# Altium PCB Main_PCB.PcbDoc (part 1 of 2)
Units mm, origin at the board's own origin, x right, y up, seen from the top; angles counter-clockwise.
Board outline 103.42 x 51.99 mm, 4 copper layers (Top Layer, Int1 (GND), Int2 (PWR), Bottom Layer), stack 1.586 mm thick; 103 components, 74 nets, 357 pads, 275 vias.
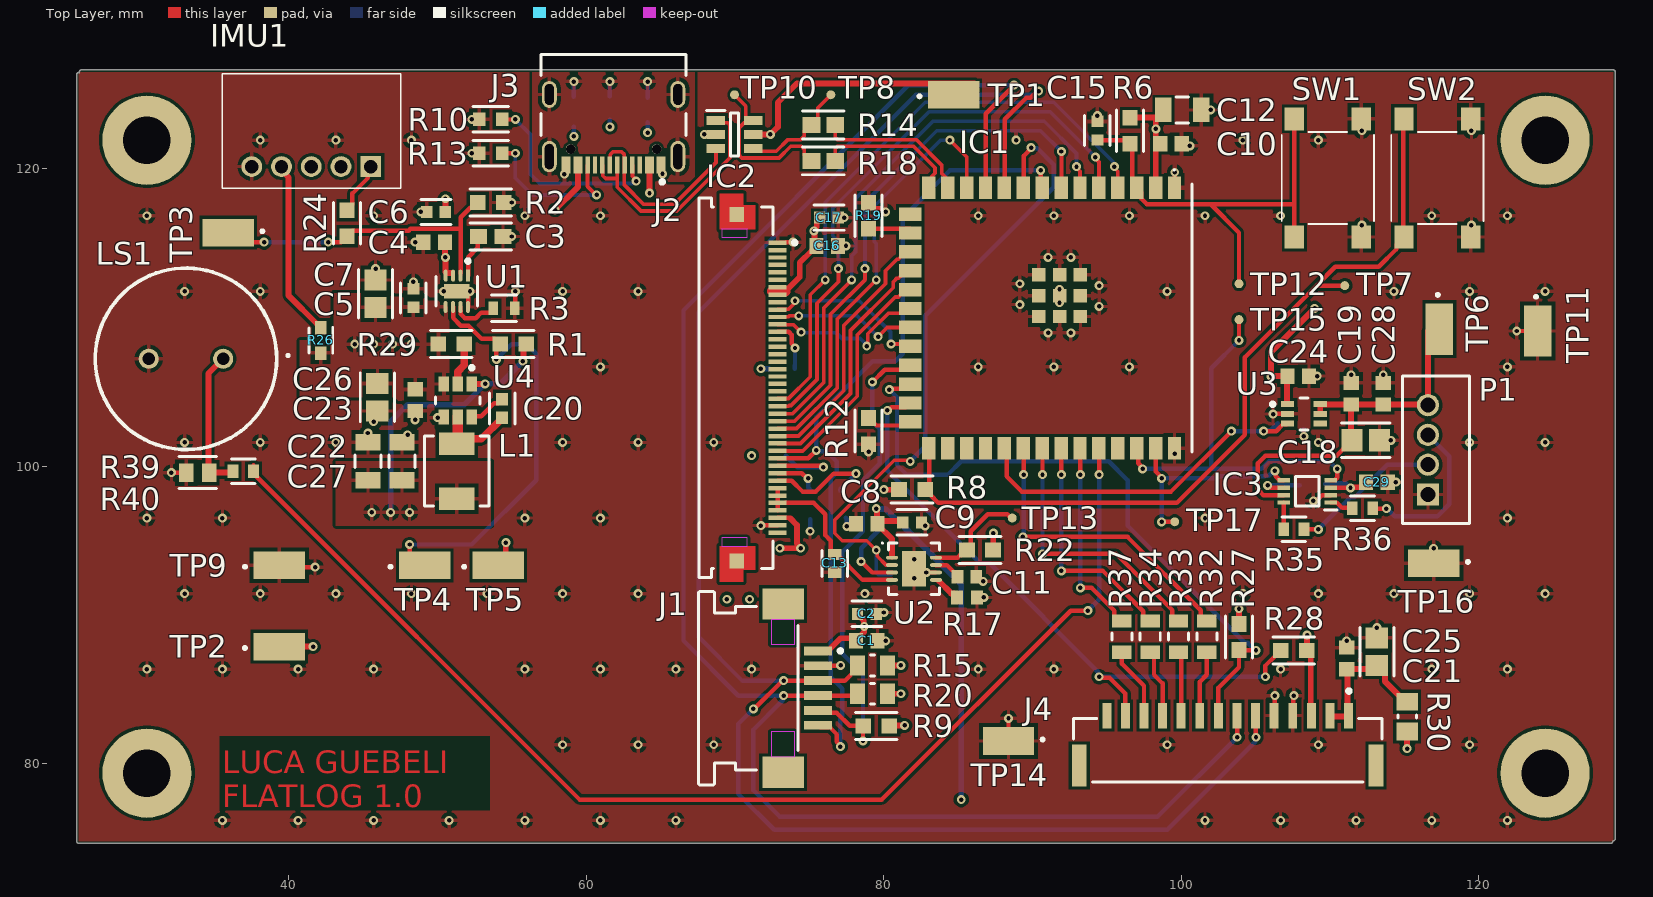
[diagram p0: Top Layer view]
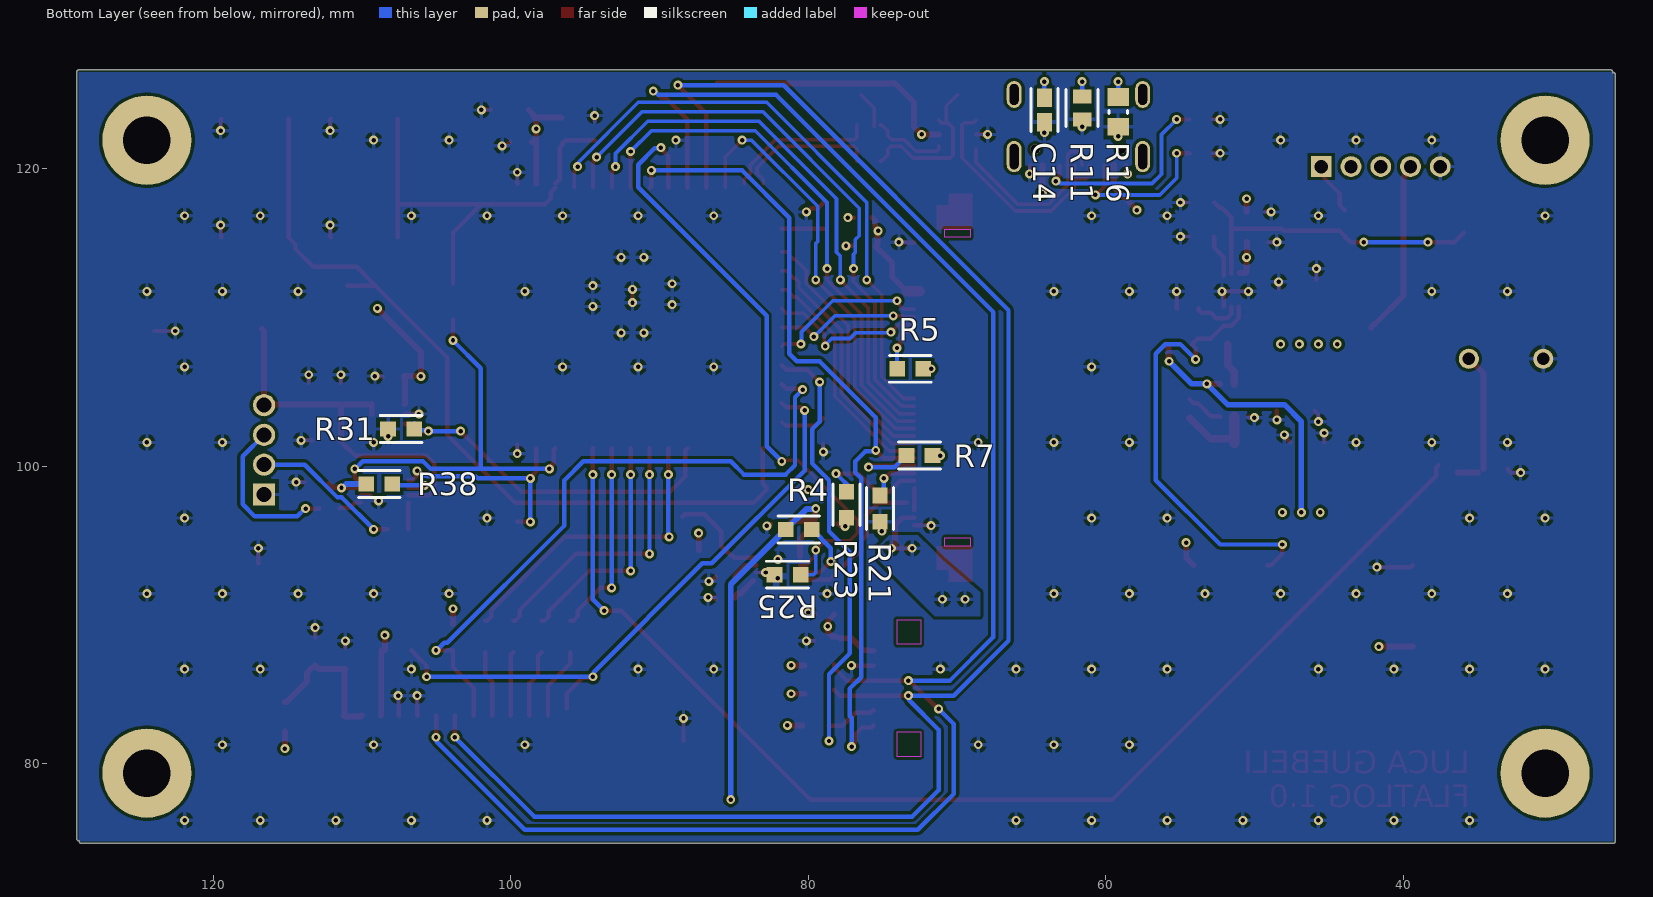
[diagram p1: Bottom Layer view, seen from below]
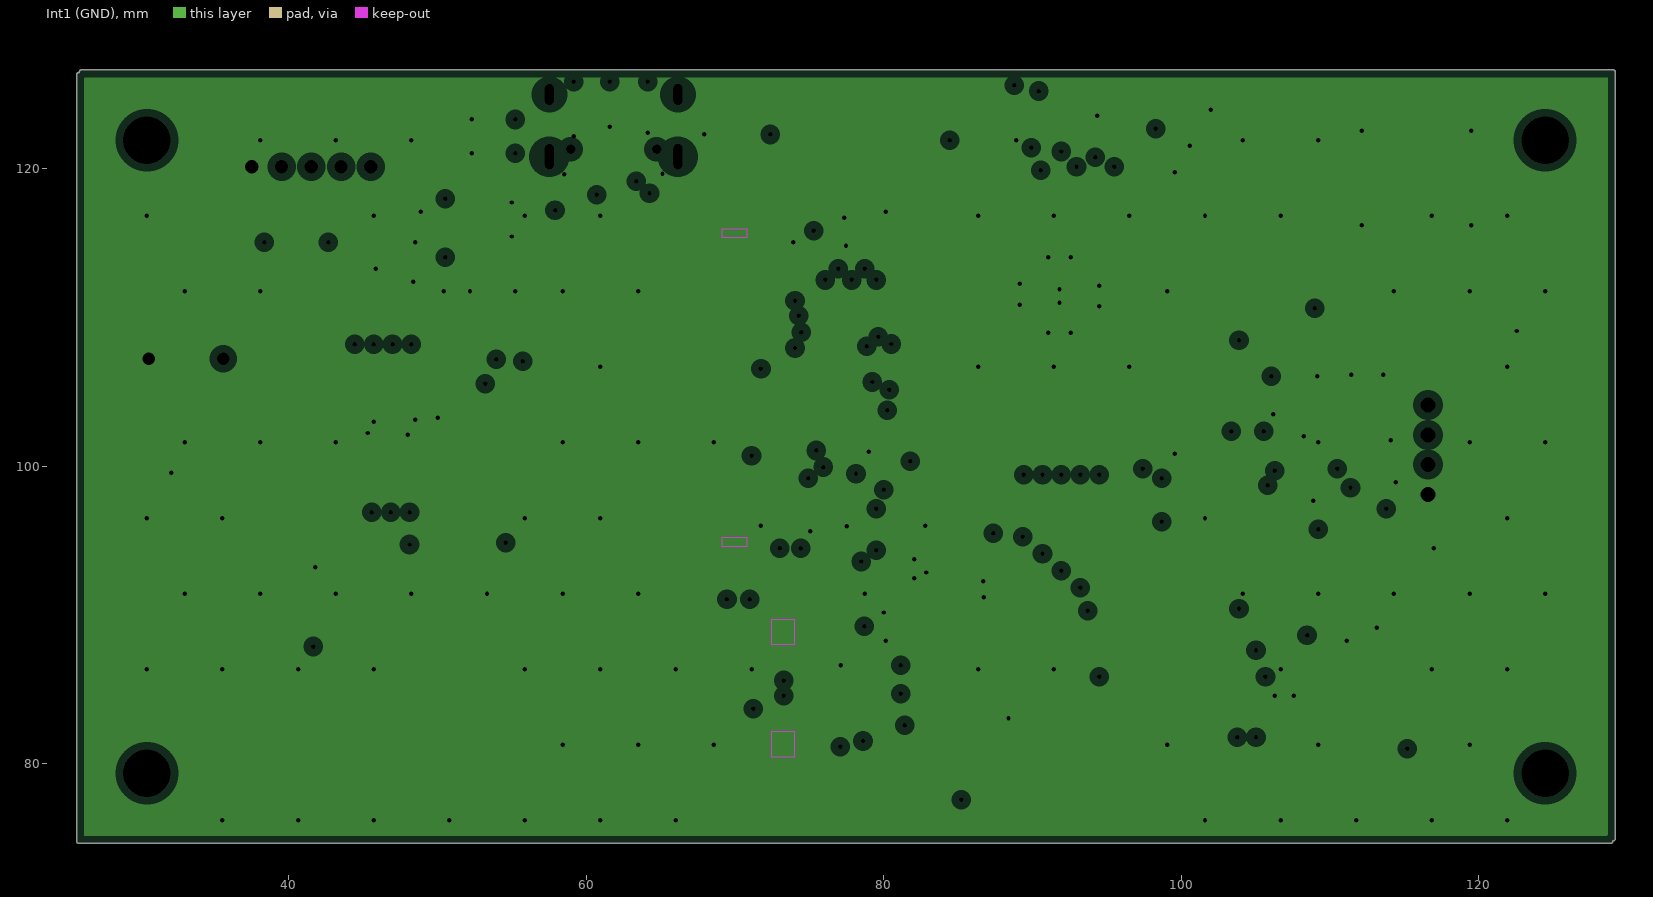
[diagram p2: Int1 (GND), clearances drawn from the general rule]
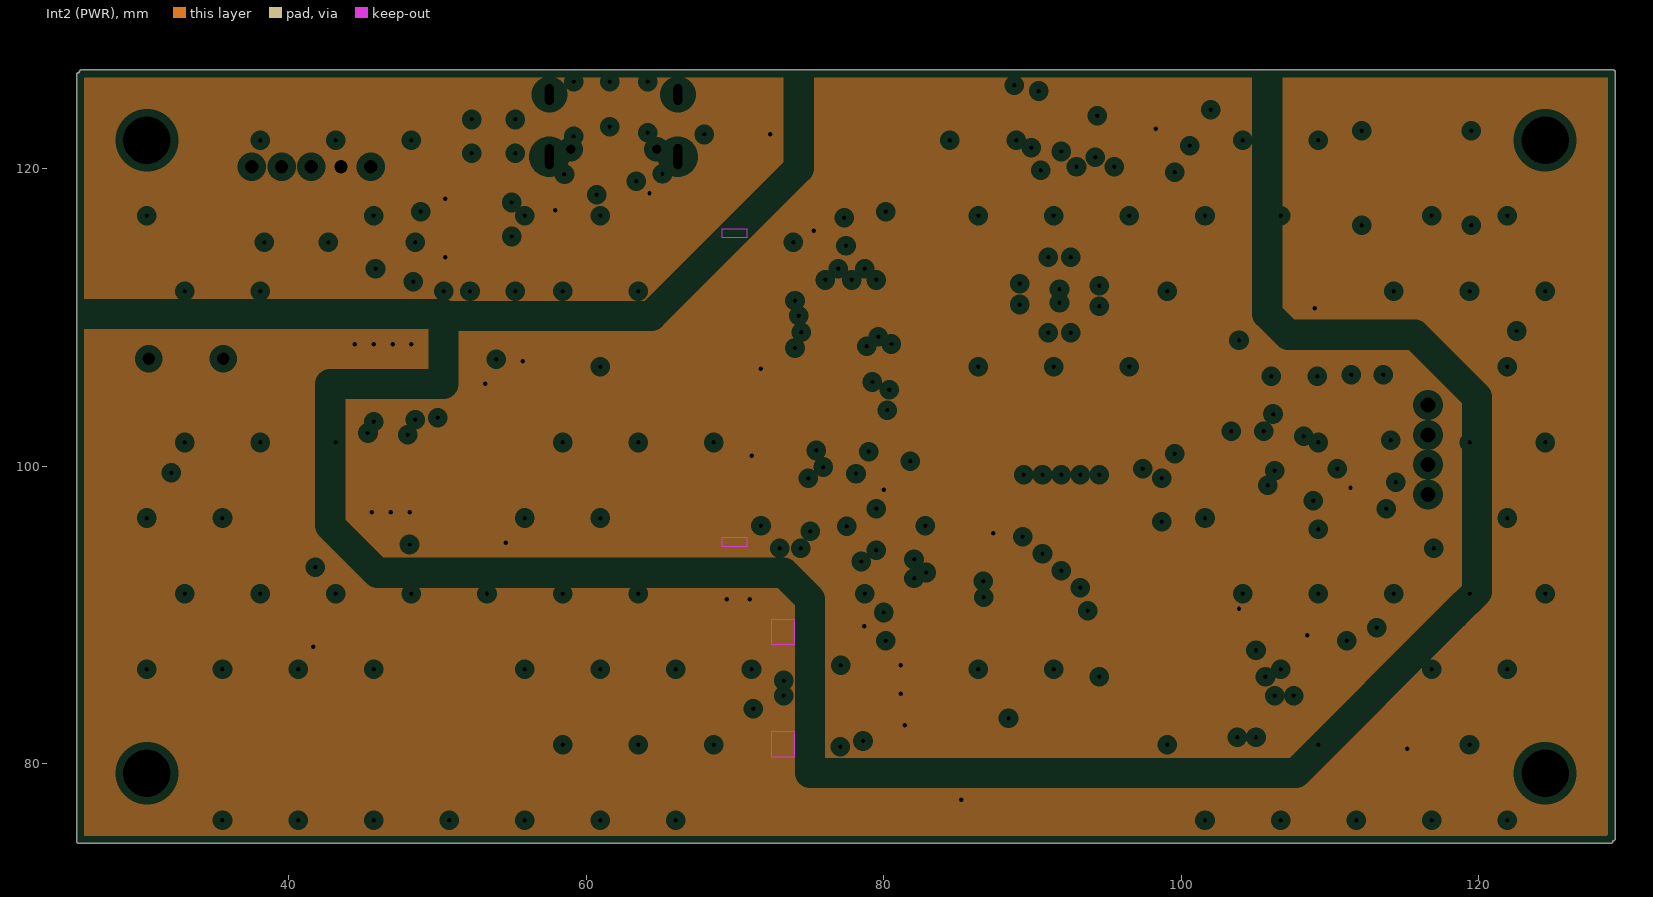
[diagram p3: Int2 (PWR), clearances drawn from the general rule]
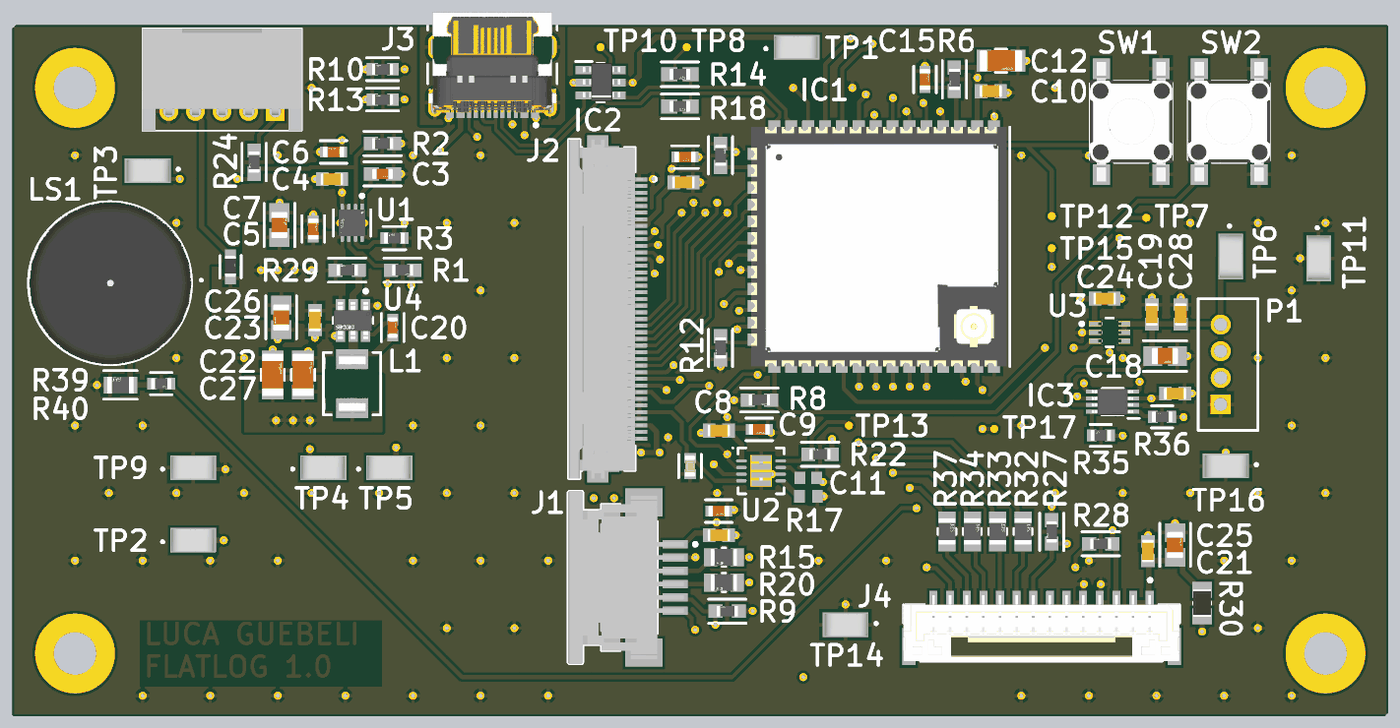
[diagram p5: 3D render of the assembled board from above, using the file's embedded part models]
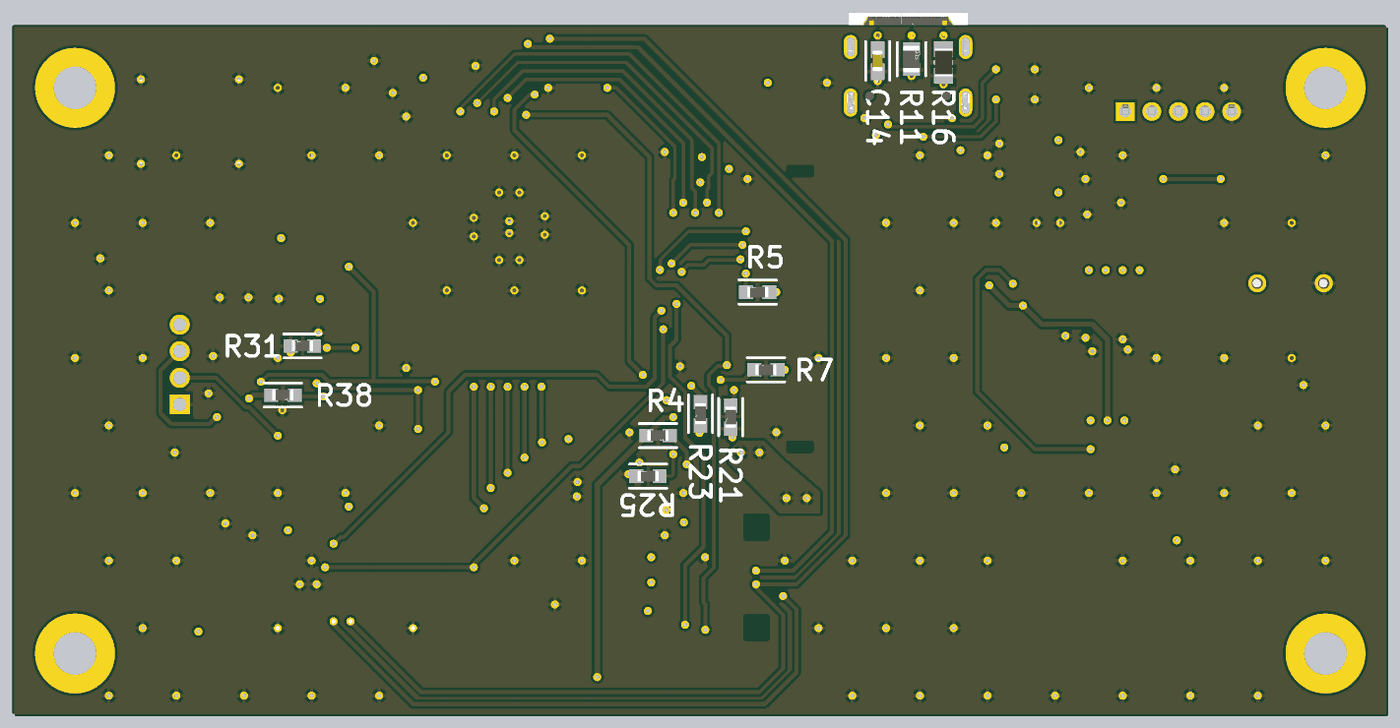
[diagram p6: 3D render of the assembled board from below, using the file's embedded part models]

## Layer stack, top to bottom
Top Solder: solder mask 0.0254, SM-001, Dk 4
Top Layer: signal copper 0.035
Dielectric 1: prepreg 0.2104, PP-017, Dk 4.3
Int1 (GND): plane copper 0.0152, net GND
Dielectric 3: core 1.065, Core-039, Dk 4.8
Int2 (PWR): plane copper 0.0152, net (Multiple Nets)
Dielectric 5: prepreg 0.2104, PP-017, Dk 4.3
Bottom Layer: signal copper 0.035
Bottom Solder: solder mask 0.0254, SM-001, Dk 4

## Board outline
25.908,74.653 cw(c25.908,74.803) 25.758,74.803 25.758,126.316 cw(c25.908,126.316) 25.936,126.464 cw(c26.084,126.492) 26.084,126.642 129.032,126.642 cw(c129.032,126.492) 129.182,126.492 129.182,74.979 cw(c129.032,74.979) 129.004,74.831 129.007,74.803 cw(c128.856,74.803) 128.856,74.653

## Design rules (kind name [scope] priority, off if disabled: settings)
Clearance Clearance_J1_Footprint_Internal [InComponent('J1') vs InComponent('J1')] p1: gap=0 ignorepadtopadclearanceinfootprint=FALSE
Clearance Clearance_J2_Footprint_Internal [InComponent('J2') vs InComponent('J2')] p2: gap=0 ignorepadtopadclearanceinfootprint=FALSE
Clearance Clearance_J3_USB_C [InComponent('J3') vs InComponent('J3')] p3: gap=0.15 ignorepadtopadclearanceinfootprint=FALSE
Clearance Clearance_U1_eFuse [InComponent('U1') vs InComponent('U1')] p4: gap=0.15 ignorepadtopadclearanceinfootprint=FALSE
Clearance [All] p5: gap=0.2 ignorepadtopadclearanceinfootprint=FALSE
DiffPairsRouting [All] p1: maxlimit=0.3 minlimit=0.15 mostfreqgap=0.2 toplayer_minwidth=0.15 toplayer_maxwidth=0.25 toplayer_prefwidth=0.2 bottomlayer_minwidth=0.15 bottomlayer_maxwidth=0.25 bottomlayer_prefwidth=0.2 maxuncoupledlength=12.7
HoleSize [All] p1: absolutevalues=TRUE maxlimit=3.54 minlimit=0.025 maxpercent=80.000 minpercent=20.000
MinimumSolderMaskSliver [All] p1: minsoldermaskwidth=0.1
PlaneClearance [All] p1: clearance=0.508
PlaneConnect [All] p1: planeconnectstyle=Relief reliefexpansion=0.508 reliefentries=4 reliefconductorwidth=0.254 reliefairgap=0.254
PolygonConnect [All] p1: connectstyle=Relief reliefconductorwidth=0.254 reliefentries=4 polygonreliefangle="90 Angle" airgapwidth=0.254
RoutingVias Via_Default [All] p1: holewidth=0.3 width=0.6 viastyle="Through Hole" minholewidth=0.3 minwidth=0.6 maxholewidth=0.4 maxwidth=0.8
SilkToSilkClearance [All] p1: silktosilkclearance=0.15
SilkToSolderMaskClearance [IsPad] p1: minsilkscreentomaskgap=0.15 clearancetoexposedcopper=TRUE
SolderMaskExpansion [All] p1: expansion=0 istentingtop=FALSE
SupplyNets "Schematic Supply Nets_1" [InNet('SYS_3V3')] p1: voltage=0.000
SupplyNets "Schematic Supply Nets" [InNet('GND')] p2: voltage=0.000
Width Width_BACKLIGHT [InNetClass('BACKLIGHT')] p1: maxlimit=0.8 minlimit=0.3 preferedwidth=0.5 minimp=50.000000 maximp=50.000000 favimp=50.000000
Width Width_POWER_3V3 [InNetClass('POWER_3V3')] p2: maxlimit=0.8 minlimit=0.3 preferedwidth=0.5 minimp=50.000000 maximp=50.000000 favimp=50.000000
Width Width_POWER_5V [InNetClass('POWER_5V')] p3: maxlimit=1 minlimit=0.4 preferedwidth=0.6 minimp=50.000000 maximp=50.000000 favimp=50.000000
Width Width_USB [InNetClass('USB_DIFF')] p4: maxlimit=0.25 minlimit=0.15 preferedwidth=0.2 minimp=50.000000 maximp=50.000000 favimp=50.000000
Width Width_LCD_I80 [InNetClass('LCD_I80')] p5: maxlimit=0.25 minlimit=0.15 preferedwidth=0.18 minimp=50.000000 maximp=50.000000 favimp=50.000000
Width Width_Default [All] p6: maxlimit=1 minlimit=0.15 preferedwidth=0.2 minimp=50.000000 maximp=50.000000 favimp=50.000000
23 further rules are at their usual default settings.

## Classes and differential pairs
differential pair USB_D_PROT: +USB_D_PROT_P -USB_D_PROT_N
differential pair USB_D_CONN: +USB_D_CONN_P -USB_D_CONN_N
differential pair USB_D_MCU: +USB_D_MCU_P -USB_D_MCU_N

## Components (designator, comment, footprint, x,y, rotation, side; value= is the part's Value field where it differs from the comment)
C1 "100nF" CAPC1608X90X35ML10T15 78.867,88.265 r180 top
C2 "1uF" FP-GRT188-0_1-e0_2_0_5-IPC_C 78.867,90.08 r0 top
C3 "3.3nF" FP-GCM188-0_1-IPC_A 53.594,115.443 r0 top
C4 "100nF" CAPC1608X90X35ML10T15 49.784,115.062 r0 top
C5 "1uF" FP-GRT188-0_1-e0_2_0_5-IPC_C 48.387,111.308 r90 top
C6 "1uF" FP-GRT188-0_1-e0_2_0_5-IPC_C 49.911,117.094 r180 top
C7 "10uF" FP-GRM21B-0_15-IPC_A 45.847,111.6 r90 top
C8 "100nF" CAPC1608X90X35ML10T15 78.867,96.139 r0 top
C9 "1uF" FP-GRT188-0_1-e0_2_0_5-IPC_C 81.915,96.229 r0 top
C10 "100nF" CAPC1608X90X35ML10T15 99.314,121.666 r180 top
C11 "10nF" CAPC1608X87X35LL15T15 85.598,92.583 r0 top
C12 "22uF" FP-GRM319-0_15-IPC_C 100.076,123.952 r0 top
C13 "470nF" FP-C0603C-CF-MFG 76.708,93.472 r270 top value="0.47 μF"
C14 "1nF" FP-GCJ188-0_2-IPC_A 64.135,123.952 r90 bottom
C15 "1uF" FP-GRT188-0_1-e0_2_0_5-IPC_C 94.361,122.555 r90 top
C16 "100nF" CAPC1608X90X35ML10T15 76.2,114.808 r180 top
C17 "1uF" FP-GRT188-0_1-e0_2_0_5-IPC_C 76.327,116.713 r0 top
C18 "10uF" FP-GRM21B-0_15-IPC_A 112.403,101.743 r0 top
C19 "100nF" CAPC1608X90X35ML10T15 111.421,104.881 r270 top
C20 "100nF" FP-GCJ188-0_2-IPC_C 54.356,103.886 r90 top
C21 "100nF" CAPC1608X90X35ML10T15 111.125,87.085 r270 top
C22 "22uF" FP-GRM319-0_15-IPC_C 47.625,100.33 r90 top
C23 "100nF" CAPC1608X90X35ML10T15 48.514,104.45 r90 top
C24 "100nF" CAPC1608X90X35ML10T15 107.865,106.061 r180 top
C25 "10uF" FP-GRM21B-0_15-IPC_A 113.158,87.54 r90 top
C26 "10uF" FP-GRM21B-0_15-IPC_A 45.974,104.648 r270 top
C27 "22uF" FP-GRM319-0_15-IPC_C 45.339,100.33 r90 top
C28 "100nF" CAPC1608X90X35ML10T15 113.58,104.881 r270 top
C29 "100nF" CAPC1608X90X35ML10T15 113.157,98.933 r180 top
IC1 "ESP32-S3-WROOM-1U-N16R8" ESP32S3WROOM1UN16R8 91.138,109.967 r270 top
IC2 "USBLC6-2SC6" SOT95P280X145-6N 69.977,122.301 r0 top
IC3 "TXU0202DCUR" SOP50P310X90-8N 108.467,98.314 r180 top
IMU1 "440055-5" 4400555 45.529,120.142 r180 top
J1 "52271-0679" MOLX-52271-0679 74.417,85.09 r270 top
J2 "54132-4062" MOLX-54132-4062 71.501,105.283 r270 top
J3 "USB4105-GF-A" FP-USB4105-GF-A-MFG 61.849,123.827 r180 top
J4 "BM14B-GHS-TBT(LF)(SN)" FP-BM14B-GHS-TBT_LF_SN-MFG 103.124,80.916 r0 top
L1 "3.3uH" FP-SRP4020TA-MFG 51.308,99.669 r270 top
LS1 "PS1240P02BT" PS1240P02BT 33.107,107.224 r270 top
P1 "B4B-PH-K-S(LF)(SN)" JST-B4B-PH-K-S_V 117.136,101.108 r90 top
R1 "10kR" FP-AC0603-IPC_A 55.106,108.204 r0 top
R2 "100kR" FP-AC0603-IPC_A 53.594,117.729 r180 top
R3 "1.3kR" FP-RMCF0603-MFG 54.483,110.617 r180 top
R4 "10kR" FP-AC0603-IPC_A 80.645,95.758 r180 bottom
R5 "10kR" FP-AC0603-IPC_A 73.152,106.553 r0 bottom
R6 "10kR" FP-AC0603-IPC_A 96.571,122.555 r270 top
R7 "10kR" FP-AC0603-IPC_A 72.529,100.711 r0 bottom
R8 "10kR" FP-AC0603-IPC_A 81.915,98.439 r0 top
R9 "10kR" FP-AC0603-IPC_A 79.502,82.55 r180 top
R10 "5.1kR" FP-AT0603-IPC_B 53.594,123.317 r180 top
R11 "1MR" FP-RMCF0805-IPC_C 61.595,124.079 r90 bottom
R12 "10kR" FP-AC0603-IPC_A 78.994,102.362 r270 top
R13 "5.1kR" FP-AT0603-IPC_B 53.594,121.038 r180 top
R14 "22R" FP-RMCF0603-IPC_A 75.946,122.936 r0 top
R15 "4.7kR" FP-RN732A-MFG 79.248,86.614 r180 top value=4.7KΩ
R16 "0R" RESC2013X60X35ML10T20 59.182,123.825 r270 bottom
R17 "0.68R" RESC1608X55X30NL15T15 85.598,91.186 r0 top
R18 "22R" FP-RMCF0603-IPC_A 75.946,120.523 r0 top
R19 "10kR" FP-AC0603-IPC_A 78.994,116.84 r90 top
R20 "4.7kR" FP-RN732A-MFG 79.248,84.709 r180 top value=4.7KΩ
R21 "10kR" FP-AC0603-IPC_A 75.184,97.155 r270 bottom
R22 "10kR" FP-AC0603-IPC_A 86.475,94.361 r180 top
R23 "10kR" FP-AC0603-IPC_A 77.45,97.409 r270 bottom
R24 "10kR" FP-AC0603-IPC_A 43.942,116.332 r270 top
R25 "100kR" FP-AC0603-IPC_A 81.395,92.71 r0 bottom
R26 "1.6kR" FP-RT0603-MFG 42.164,108.458 r90 top value=1.6KΩ
R27 "10kR" FP-AC0603-IPC_A 103.886,88.519 r270 top
R28 "10kR" FP-AC0603-IPC_A 107.569,87.63 r180 top
R29 "100kR" FP-AC0603-IPC_A 50.939,108.204 r180 top
R30 "0R" RESC2013X60X35ML10T20 115.189,83.169 r90 top
R31 "100kR" FP-AC0603-IPC_A 107.369,102.505 r0 bottom
R32 "33R" FP-RMCF0805-MFG 101.727,88.553 r90 top
R33 "33R" FP-RMCF0805-MFG 99.822,88.553 r90 top
R34 "33R" FP-RMCF0805-MFG 97.917,88.553 r90 top
R35 "100R" FP-RNCP0603-MFG 107.574,95.774 r0 top
R36 "100R" FP-RNCP0603-MFG 112.183,97.171 r0 top
R37 "33R" FP-RMCF0805-MFG 96.012,88.553 r90 top
R38 "10kR" FP-AC0603-IPC_A 108.839,98.806 r180 bottom
R39 "100R" FP-RNCP0603-MFG 36.957,99.669 r180 top
R40 "1MR" FP-RMCF0805-IPC_C 33.895,99.568 r180 top
SW1 "430182043816" 430182043816 109.859,119.38 r90 top
SW2 "430182043816" 430182043816 117.221,119.38 r90 top
TP1 "S1751-46R" S175146R 84.709,124.968 r180 top
TP2 "S1751-46R" S175146R 39.37,87.884 r180 top
TP3 "S1751-46R" S175146R 35.941,115.697 r0 top
TP4 "S1751-46R" S175146R 49.149,93.345 r180 top
TP5 "S1751-46R" S175146R 54.102,93.345 r180 top
TP6 "S1751-46R" S175146R 117.348,109.22 r90 top
TP7 "TPAD6R" TP06R 110.998,112.141 r90 top
TP8 "TPAD6R" TP06R 76.454,124.968 r90 top
TP9 "S1751-46R" S175146R 39.37,93.345 r180 top
TP10 "TPAD6R" TP06R 69.977,124.968 r90 top
TP11 "S1751-46R" S175146R 123.952,109.093 r90 top
TP12 "TPAD6R" TP06R 103.886,112.268 r90 top
TP13 "TPAD6R" TP06R 88.646,96.52 r90 top
TP14 "S1751-46R" S175146R 88.392,81.534 r0 top
TP15 "TPAD6R" TP06R 103.886,109.855 r90 top
TP16 "S1751-46R" S175146R 116.967,93.472 r0 top
TP17 "TPAD6R" TP06R 99.568,96.266 r90 top
U1 "TPS259531DSGR" FP-DSG0008A-IPC_A 51.308,111.76 r270 top
U2 "STCS1APUR" DFN8(3x3)-P050_N 82.042,93.11 r0 top
U3 "TPS22919DCKR" FP-DCK0006A-MFG 108.246,103.521 r0 top
U4 "AP63203WU-7" FP-TSOT26-MFG 51.374,104.423 r270 top

## Footprints (in the part's own frame and the unit in brackets; to place one, negate y for a bottom-side part, rotate by r counter-clockwise, add the part's x,y. Pads: shape width x height; smd on the part's side, far side on the other; paste and mask are expansions set on the pad)
4400555 [mm]
  rect 1.4x1.4 hole 0.9: 1(0,0)
  round 1.4 hole 0.9: 2(2,0) 3(4,0) 4(6,0) 5(8,0)
  silkscreen extent -2,-6.25 10,1.45, body extent -2,-6.25 10,1.45, height 4.88
430182043816 [mm] "SMD Tact Switch, body 6x6mm"
  rect 1.55x1.3 smd: A1(-3.975,2.25) A2(3.975,2.25) B1(-3.975,-2.25) B2(3.975,-2.25)
  silkscreen extent -3.1,-3.1 3.1,3.1, body extent -4.5,-3.1 4.5,3.1, height 4.3
CAPC1608X87X35LL15T15 [mm] "Chip Capacitor, 2-Leads, Body 1.60x0.80mm, IPC High Density"
  rect 0.8x0.9 smd: 1(-0.625,0) 2(0.625,0)
  body extent -0.87,-0.48 0.87,0.48, height 0.87
CAPC1608X90X35ML10T15 [mm] "Chip Capacitor, 2-Leads, Body 1.7x0.9mm, IPC Low Density"
  rect 0.95x1.05 smd: 1(-0.725,0) 2(0.725,0)
  body extent -0.85,-0.45 0.85,0.45, height 0.9
DFN8(3x3)-P050_N [mm] "SON, 8-Leads, Body 3x3mm, Pitch 0.5mm, Thermal Pad 2.38x1.64mm, IPC Medium Density"
  oval 0.8x0.25 smd: 1(-1.475,0.75) 2(-1.475,0.25) 3(-1.475,-0.25) 4(-1.475,-0.75) 5(1.475,-0.75) 6(1.475,-0.25) 7(1.475,0.25) 8(1.475,0.75)
  rect 1.64x2.38 smd paste-0.82: 9(0,0)
  silkscreen extent -2.17,-1.72 1.73,1.77, body extent -1.57,-1.57 1.58,1.58, height 1
ESP32S3WROOM1UN16R8 [mm]
  rect 1.5x0.9 smd: 1(-8.75,8.41) 2(-8.75,7.14) 3(-8.75,5.87) 4(-8.75,4.6) 5(-8.75,3.33) 6(-8.75,2.06) 7(-8.75,0.79) 8(-8.75,-0.48) 9(-8.75,-1.75) 10(-8.75,-3.02) 11(-8.75,-4.29) 12(-8.75,-5.56) 13(-8.75,-6.83) 14(-8.75,-8.1) 27(8.75,-8.1) 28(8.75,-6.83) 29(8.75,-5.56) 30(8.75,-4.29) 31(8.75,-3.02) 32(8.75,-1.75) 33(8.75,-0.48) 34(8.75,0.79) 35(8.75,2.06) 36(8.75,3.33) 37(8.75,4.6) 38(8.75,5.87) 39(8.75,7.14) 40(8.75,8.41)
  rect 0.9x1.5 smd: 15(-6.985,-9.35) 16(-5.715,-9.35) 17(-4.445,-9.35) 18(-3.175,-9.35) 19(-1.905,-9.35) 20(-0.635,-9.35) 21(0.635,-9.35) 22(1.905,-9.35) 23(3.175,-9.35) 24(4.445,-9.35) 25(5.715,-9.35) 26(6.985,-9.35)
  rect 0.9x0.9 smd: 41(-1.5,0.69) 42(-1.5,2.09) 43(-2.9,2.09) 44(-2.9,0.69) 45(-2.9,-0.71) 46(-1.5,-0.71) 47(-0.1,-0.71) 48(-0.1,0.69) 49(-0.1,2.09)
  silkscreen extent -10,8.35 9,9.6, body extent -9,-9.85 9,9.35, height 3.35
FP-AC0603-IPC_A [mm]
  rect 1.059x1.012 smd paste+0 mask+0: 1(-0.877,0) 2(0.877,0)
  silkscreen extent -1.41,-0.91 1.41,0.91, body extent -1.91,-1.01 1.91,1.01, height 0.25
FP-AT0603-IPC_B [mm]
  rect 0.859x0.912 smd paste+0 mask+0: 1(-0.777,0) 2(0.777,0)
  silkscreen extent -1.21,-0.86 1.21,0.86, body extent -1.46,-0.71 1.46,0.71, height 0.25
FP-BM14B-GHS-TBT_LF_SN-MFG [mm]
  rect 0.6x1.7 smd paste+0 mask+0: 1(8.125,2.325) 2(6.875,2.325) 3(5.625,2.325) 4(4.375,2.325) 5(3.125,2.325) 6(1.875,2.325) 7(0.625,2.325) 8(-0.625,2.325) 9(-1.875,2.325) 10(-3.125,2.325) 11(-4.375,2.325) 12(-5.625,2.325) 13(-6.875,2.325) 14(-8.125,2.325)
  rect 1x2.8 smd paste+0 mask+0: 15(-9.975,-1.025) 16(9.975,-1.025)
  silkscreen extent -10.38,-2.12 10.38,4.1, body extent -10.58,-2.52 10.58,3.27, height 0.25
FP-C0603C-CF-MFG [mm]
  rect 0.75x0.9 smd paste+0 mask+0: 1(-0.6,0) 2(0.6,0)
  silkscreen extent -0.87,-0.85 0.88,0.85, body extent -1.2,-0.6 1.2,0.6, height 0.25
FP-DCK0006A-MFG [mm]
  rect 0.9x0.4 smd paste-1000 mask+0: 1(-1.1,0.65) 2(-1.1,0) 3(-1.1,-0.65) 4(1.1,-0.65) 5(1.1,0) 6(1.1,0.65)
  silkscreen extent -2.22,-1.07 0.27,1.07, body extent -1.65,-1.33 1.65,1.33, height 0.25
FP-DSG0008A-IPC_A [mm]
  rect 0.806x0.257 smd paste+0 mask+0: 1(-1.053,0.75)
  rrect100% 0.806x0.257 smd paste+0 mask+0: 2(-1.053,0.25) 3(-1.053,-0.25) 4(-1.053,-0.75) 5(1.053,-0.75) 6(1.053,-0.25) 7(1.053,0.25) 8(1.053,0.75)
  rect 1x1.7 smd paste-1000 mask+0: 9(0,0)
  silkscreen extent -2.16,-1.4 1,1.4, body extent -1.96,-1.5 1.96,1.5, height 0.25
FP-GCJ188-0_2-IPC_A [mil]
  rect 49.42x39.85 smd paste+0 mask+0: 1(-32.5,0) 2(32.5,0)
  silkscreen extent -57,-36 57,36, body extent -31,-16 31,16, height 35
FP-GCJ188-0_2-IPC_C [mm]
  rect 0.855x0.812 smd paste+0 mask+0: 1(-0.625,0) 2(0.625,0)
  silkscreen extent -1.05,-0.85 1.05,0.85, body extent -1.15,-0.55 1.15,0.55, height 0.25
FP-GCM188-0_1-IPC_A [mm]
  rect 1.159x1.012 smd paste+0 mask+0: 1(-0.827,0) 2(0.827,0)
  silkscreen extent -1.41,-0.91 1.41,0.91, body extent -1.91,-1.01 1.91,1.01, height 0.25
FP-GRM21B-0_15-IPC_A [mm]
  rect 1.406x1.508 smd paste+0 mask+0: 1(-0.926,0) 2(0.926,0)
  silkscreen extent -1.63,-1.15 1.63,1.15, body extent -2.13,-1.25 2.13,1.25, height 0.25
FP-GRM319-0_15-IPC_C [mm]
  rect 1.106x1.658 smd paste+0 mask+0: 1(-1.276,0) 2(1.276,0)
  silkscreen extent -0.42,-0.87 0.42,0.87, body extent -1.93,-0.97 1.93,0.97, height 0.25
FP-GRT188-0_1-e0_2_0_5-IPC_C [mm]
  rect 0.759x0.812 smd paste+0 mask+0: 1(-0.627,0) 2(0.627,0)
  silkscreen extent -1.01,-0.85 1.01,0.85, body extent -1.11,-0.55 1.11,0.55, height 0.25
FP-RMCF0603-IPC_A [mm]
  rect 1.206x1.058 smd paste+0 mask+0: 1(-0.801,0) 2(0.801,0)
  silkscreen extent -1.4,-0.93 1.4,0.93, body extent -1.9,-1.03 1.9,1.03, height 0.25
FP-RMCF0603-MFG [mm]
  rect 0.65x0.9 smd paste+0 mask+0: 1(-0.725,0) 2(0.725,0)
  silkscreen extent -0.85,-0.88 0.85,0.88, body extent -0.77,-0.4 0.77,0.4, height 0.55
FP-RMCF0805-IPC_C [mm]
  rect 0.955x1.262 smd paste+0 mask+0: 1(-0.776,0) 2(0.776,0)
  silkscreen extent -1.25,-1.07 1.25,1.07, body extent -1,-0.63 1,0.63, height 0.65
FP-RMCF0805-MFG [mm]
  rect 0.9x1.3 smd paste+0 mask+0: 1(-1.05,0) 2(1.05,0)
  silkscreen extent -0.23,-0.67 0.23,0.67, body extent -1.6,-0.77 1.6,0.77, height 0.25
FP-RN732A-MFG [mm]
  rect 1x1.35 smd paste+0 mask+0: 1(-1,0) 2(1,0)
  silkscreen extent -0.13,-0.7 0.13,0.7, body extent -1.6,-0.8 1.6,0.8, height 0.25
FP-RNCP0603-MFG [mm]
  rect 0.725x0.9 smd paste+0 mask+0: 1(-0.687,0) 2(0.687,0)
  silkscreen extent -0.81,-0.83 0.8,0.82, body extent -1.15,-0.55 1.15,0.55, height 0.25
FP-RT0603-MFG [mm]
  rect 0.9x0.8 smd paste+0 mask+0: 1(-0.85,0) 2(0.85,0)
  silkscreen extent -0.85,-0.81 0.86,0.8, body extent -1.4,-0.55 1.4,0.55, height 0.25
FP-SRP4020TA-MFG [mm]
  rect 1.5x2.4 smd paste+0 mask+0: 1(-1.85,0) 2(1.85,0)
  silkscreen extent -2.35,-2.15 2.35,2.15, body extent -2.7,-2.25 2.7,2.25, height 0.25
FP-TSOT26-MFG [mm]
  rect 1x0.7 smd paste+0 mask+0: 1(-1.099,0.95) 2(-1.099,0) 3(-1.099,-0.95) 4(1.099,-0.95) 5(1.099,0) 6(1.099,0.95)
  silkscreen extent -2.32,-1.5 0.22,1.5, body extent -1.7,-1.6 1.7,1.6, height 0.25
FP-USB4105-GF-A-MFG [mm]
  rrect100% 1x2.1 hole 1.7 slot 0.6 at 0 deg paste-2539.97 mask+0: 1(-4.32,3.015) 2(4.32,3.015)
  rrect100% 1x1.8 hole 1.4 slot 0.6 at 0 deg paste-2539.97 mask+0: 3(-4.32,-1.165) 4(4.32,-1.165)
  rect 0.6x1.15 smd paste+0 mask+0: A1-B12(-3.2,3.59) A4-B9(-2.4,3.59) B1-A12(3.2,3.59) B4-A9(2.4,3.59)
  rect 0.3x1.15 smd paste+0 mask+0: A5(-1.25,3.59) A6(-0.25,3.59) A7(0.25,3.59) A8(1.25,3.59) B5(1.75,3.59) B6(0.75,3.59) B7(-0.75,3.59) B8(-1.75,3.59)
  round 0.65 hole 0.65 unplated paste-2539.97 mask+0: ""(-2.89,2.515) ""(2.89,2.515)
  silkscreen extent -4.86,-3.84 4.86,4.84, body extent -4.96,-3.94 4.96,4.27, height 0.25
JST-B4B-PH-K-S_V [mm] "Connector, 4-Leads, Body 9.9x4.5mm, Pitch 2mm"
  rect 1.5x1.5 hole 1: 1(-3,0.55)
  round 1.5 hole 1: 2(-1,0.55) 3(1,0.55) 4(3,0.55)
  silkscreen extent -4.95,-2.25 4.95,2.25, body extent -4.95,-2.25 4.95,2.25, height 6
MOLX-52271-0679 [mm] "FPC Connector, 6-Leads, Right Angle, Pitch 1.0 mm, Mated Height 3.0 mm, SMT"
  rect 0.6x1.9 smd: 1(-2.5,1.175) 2(-1.5,1.175) 3(-0.5,1.175) 4(0.5,1.175) 5(1.5,1.175) 6(2.5,1.175)
  rect 2.1x2.8 smd: MP1(-5.65,-1.175) MP2(5.65,-1.175)
  Keep-Out Layer region: 2.95,-1.975 4.6,-1.975 4.6,-0.375 2.95,-0.375
  Keep-Out Layer region: -4.6,-1.975 -2.95,-1.975 -2.95,-0.375 -4.6,-0.375
  silkscreen extent -6.5,-6.87 6.5,2.8, body extent -6.5,-6.87 6.5,1.83, height 3.01
MOLX-54132-4062 [mm] "FPC Connector, 40-Leads, Right Angle, Pitch 0.5 mm, Mated Height 2.0 mm, SMT"
  rect 0.3x1.2 smd: 1(-9.75,1.375) 2(-9.25,1.375) 3(-8.75,1.375) 4(-8.25,1.375) 5(-7.75,1.375) 6(-7.25,1.375) 7(-6.75,1.375) 8(-6.25,1.375) 9(-5.75,1.375) 10(-5.25,1.375) 11(-4.75,1.375) 12(-4.25,1.375) 13(-3.75,1.375) 14(-3.25,1.375) 15(-2.75,1.375) 16(-2.25,1.375) 17(-1.75,1.375) 18(-1.25,1.375) 19(-0.75,1.375) 20(-0.25,1.375) 21(0.25,1.375) 22(0.75,1.375) 23(1.25,1.375) 24(1.75,1.375) 25(2.25,1.375) 26(2.75,1.375) 27(3.25,1.375) 28(3.75,1.375) 29(4.25,1.375) 30(4.75,1.375) 31(5.25,1.375) 32(5.75,1.375) 33(6.25,1.375) 34(6.75,1.375) 35(7.25,1.375) 36(7.75,1.375) 37(8.25,1.375) 38(8.75,1.375) 39(9.25,1.375) 40(9.75,1.375)
  rect 1x1 smd: MP1(-11.65,-1.375) MP2(11.65,-1.375)
  Top Layer region: 10.65,-0.125 12.25,-0.125 12.25,-0.925 13.05,-0.925 13.05,-2.525 10.65,-2.525
  Top Layer region: -10.65,-0.125 -12.25,-0.125 -12.25,-0.925 -13.05,-0.925 -13.05,-2.525 -10.65,-2.525
  Keep-Out Layer region: 10.1,-2.375 10.65,-2.375 10.65,-0.675 10.1,-0.675
  Keep-Out Layer region: -10.1,-0.675 -10.65,-0.675 -10.65,-2.375 -10.1,-2.375
  silkscreen extent -12.75,-3.93 12.75,2.65, body extent -12.75,-3.92 12.75,1.68, height 2.01
PS1240P02BT [mm]
  round 1.35 hole 0.85: 1(0,2.5) 2(0,-2.5)
  silkscreen extent -6.1,-6.1 6.1,6.91, body extent -6.1,-6.06 6.1,6.12, height 7.11
RESC1608X55X30NL15T15 [mm] "Chip Resistor, 2-Leads, Body 1.60x0.80mm, IPC Medium Density"
  rect 0.8x0.95 smd: 1(-0.675,0) 2(0.675,0)
  body extent -0.87,-0.48 0.87,0.48, height 0.55
RESC2013X60X35ML10T20 [mm] "Chip Resistor, 2-Leads, Body 2.1x1.35mm, IPC Low Density"
  rect 1.2x1.45 smd: 1(-1,0) 2(1,0)
  silkscreen extent -0.1,-0.63 0.1,0.63, body extent -1.05,-0.68 1.05,0.67, height 0.6
S175146R [mm]
  rect 3.45x1.85 smd: 1(0,0)
  silkscreen extent 2.2,0 2.4,0.2, body extent -1.58,-0.83 1.67,0.82, height 2.05
SOP50P310X90-8N [mm]
  rect 0.85x0.3 smd: 1(-1.575,0.75) 2(-1.575,0.25) 3(-1.575,-0.25) 4(-1.575,-0.75) 5(1.575,-0.75) 6(1.575,-0.25) 7(1.575,0.25) 8(1.575,0.75)
  silkscreen extent -2,-1 0.8,1.25, body extent -1.55,-1 1.55,1, height 0.77
SOT95P280X145-6N [mm]
  rect 1.25x0.6 smd: 1(-1.25,0.95) 2(-1.25,0) 3(-1.25,-0.95) 4(1.25,-0.95) 5(1.25,0) 6(1.25,0.95)
  silkscreen extent -1.88,-1.45 0.28,1.6, body extent -1.32,-1.4 1.48,1.5, height 1.2
TP06R [mm] "Testpoint, round, d=0.6mm"
  round 0.6 smd paste-1: 1(0,0)

## Part data
C1 C4 C8 C10 C16 C19 C21 C23 C24 C28 C29: library part CMP-2006-02375-5, "Chip Capacitor, 100 nF, +/- 10%, 50 V, -55 to 125 degC, 0603 (1608 Metric), RoHS, Tape and Reel", Manufacturer=Murata, Max Operating Temperature="125 degC", Min Operating Temperature="-55 degC", Package Quantity=4000, Voltage Rating="50 V", ComponentLink1Description="Manufacturer URL", ComponentLink1URL=http://www.murata.com/, ComponentLink2Description=Datasheet, ComponentLink2URL=http://psearch.en.murata.com/capacitor/product/GCM188R71H104KA57%23.pdf, DatasheetVersion=07/2016, Height="0.8 mm", Length="1.6 mm", Mount="Surface Mount", Mounting Technology="Surface Mount", PackageDescription="2-Pin Surface Mount Device, Body 1.6 x 0.8 mm", PackageReference=0603, Packaging="Tape and Reel", REACH SVHC="No SVHC", RoHSCompliant=true
C2 C5 C6 C9 C15 C17: library part CMP-06035-050353-1, "Multi-Layer Ceramic Capacitor 1uF 25V X7R ±10% 0603 Paper T/R"
C3: library part CMP-06035-061846-1, "Ceramic Capacitor for Automotive 3.3nF  ±5% 50VDC C0G 0603 Paper T/R", Case Code (Imperial)=0603, Case Code (Metric)=1608, Dielectric=C0G, Max Operating Temperature=125°C, Min Operating Temperature=-55°C, Package Quantity=10000, Ratings=AEC-Q200, Tolerance=5%, Voltage Rating=50V, Capacitance=3.3nF, Case/Package=0603, Height=0.8mm, Length=0.063inch, Mount="Surface Mount", Packaging="Tape and Reel", RoHS Compliant=Yes, Termination=SMD/SMT, Thickness=0.035inch, Voltage Rating (DC)=50V, Weight=0.000222oz, Width=0.031inch
C7 C18 C25 C26: library part CMP-06035-013048-1, "Chip Multilayer Ceramic Capacitors for General Purpose, 0805, 10uF, X5R, 15%, 20%, 25V", Case Code (Imperial)=0805, Case Code (Metric)=2012, Dielectric=X5R, Max Operating Temperature=85°C, Min Operating Temperature=-55°C, Package Quantity=3000, Resistor Type=Ceramic, Tolerance=20%, Voltage Rating=25V, Capacitance=10uF, Case/Package=0805, Depth=1.25mm, Height=1.25mm, Lead Free="Lead Free", Length=2mm, Mount="Surface Mount", Packaging="Tape and Reel", REACH SVHC="No SVHC", Termination=SMD/SMT, Thickness=0.055inch, Voltage Rating (DC)=25V, Weight=0.000335oz, Width=0.049inch
C11: library part CMP-2006-03035-1, Manufacturer=Kemet, Part Number=C0603C103J5RALTU
C12 C22 C27: library part CMP-06035-037955-1, "Chip Multilayer Ceramic Capacitors for General Purpose, 1206, 22uF, X5R, 15%, 20%, 16V", Case Code (Imperial)=1206, Case Code (Metric)=3216, Dielectric=X5R, Max Operating Temperature=85°C, Min Operating Temperature=-55°C, Package Quantity=4000, Resistor Type=Ceramic, Tolerance=20%, Voltage Rating=16V, Capacitance=22uF, Case/Package=1206, Height=0.85mm, Length=0.126inch, Mount="Surface Mount", Packaging="Tape and Reel", Termination=SMD/SMT, Thickness=0.037inch, Voltage Rating (DC)=16V, Weight=0.001411oz, Width=0.063inch
C13: library part CMP-03020-000294-1, "CAP CER SMD 0603 .47UF 5% X7R 16", Capacitance="0.47 μF", Manufacturer=KEMET, Manufacturer Part Number=C0603C474J4RACAUTO, Package=C0603C-CF, Temperature="-55°C to +125°C", Temperature Characteristic=X7R, Temperature Coefficient=30ppm/°C, Temperature Range High=+125°C, Temperature Range Low=-55°C, Tolerance=0.05, Voltage Rating="16 V", Automotive=Yes, Automotive Grade="Grade 1", Category=Cap, ComponentLink2Description=Datasheet, ComponentLink2URL=https://api.kemet.com/component-edge/download/datasheet/C0603C100J5GACAUTO.pdf, Device Class L1="Passive Components", Device Class L2=Capacitors, Device Class L3="Ceramic Capacitors", Digikey Description="CAP CER SMD 0603 .47UF 5% X7R 16", Height=0.87mm, Lead Free=Yes, Material=Ceramic, Mouser Description="Multilayer Ceramic Capacitor Automotive Grad X7R 0.47uF 5% 16V SMD 0603 Paper T/R", Octopart=https://octopart.com/c0603c474j4racauto-kemet-80813680, RoHS=TRUE
C14: library part CMP-2006-02221-2, "Cap Ceramic 1000pF 50V X7R 10% Pad SMD 0603 Soft Termination +125°C Automotive T/R", Case Code (Imperial)=0603, Case Code (Metric)=1608, Dielectric=X7R, Max Operating Temperature=125°C, Min Operating Temperature=-55°C, Package Quantity=4000, Ratings=AEC-Q200, Tolerance=10%, Voltage Rating=50V, Capacitance=1nF, Case/Package=0603, Features="Soft Termination", Lead Free="Lead Free", Length=0.063inch, Mount="Surface Mount", Packaging="Tape and Reel", Termination=SMD/SMT, Thickness=0.031inch, Voltage Rating (DC)=50V, Width=0.031inch
C20: library part CMP-2006-02223-2, "Cap Ceramic 0.1uF 50V X7R 10% Pad SMD 0603 Soft Termination +125°C Automotive T/R", Case Code (Imperial)=0603, Case Code (Metric)=1608, Dielectric=X7R, Max Operating Temperature=125°C, Min Operating Temperature=-55°C, Package Quantity=1, Ratings=AEC-Q200, Tolerance=10%, Voltage Rating=50V, Capacitance=100nF, Case/Package=0603, Depth=0.8mm, Features="Soft Termination", Height=0.8mm, Lead Free="Lead Free", Length=1.6mm, Mount="Surface Mount", Packaging="Tape and Reel", Radiation Hardening=No, Termination=SMD/SMT, Thickness=0.035inch, Voltage Rating (DC)=50V, Width=0.031inch
IC1: "Integrated Circuit", Manufacturer_Name="Espressif Systems", Mouser Part Number=356-ESP32S3WM1UN16R8, Datasheet Link=https://www.espressif.com/sites/default/files/documentation/esp32-s3-wroom-1_wroom-1u_datasheet_en.pdf, Height=3.35mm, Manufacturer_Part_Number=ESP32-S3-WROOM-1U-N16R8, Mouser Price/Stock=https://www.mouser.co.uk/ProductDetail/Espressif-Systems/ESP32-S3-WROOM-1U-N16R8?qs=Li%252BoUPsLEns6V0Pr5KRJtw%3D%3D
IC2: "Integrated Circuit", Manufacturer_Name=STMicroelectronics, Mouser Part Number=511-USBLC6-2SC6, Arrow Part Number=USBLC6-2SC6, Arrow Price/Stock=https://www.arrow.com/en/products/usblc6-2sc6/stmicroelectronics?utm_currency=USD&region=europe, Datasheet Link=https://www.st.com/resource/en/datasheet/usblc6-2.pdf, Height=1.45mm, Manufacturer_Part_Number=USBLC6-2SC6, Mouser Price/Stock=https://www.mouser.co.uk/ProductDetail/STMicroelectronics/USBLC6-2SC6?qs=po45yt2pPpu%2FhNIlwQdTlg%3D%3D
IC3: "Integrated Circuit", Manufacturer_Name="Texas Instruments", Mouser Part Number=595-TXU0202DCUR, Arrow Part Number=TXU0202DCUR, Arrow Price/Stock=https://www.arrow.com/en/products/txu0202dcur/texas-instruments.html?utm_currency=USD&region=nac, Datasheet Link=https://www.ti.com/product/ja-jp/TXU0202, Height=0.9mm, Manufacturer_Part_Number=TXU0202DCUR, Mouser Price/Stock=https://www.mouser.co.uk/ProductDetail/Texas-Instruments/TXU0202DCUR?qs=t7xnP681wgVssPLUozppFA%3D%3D
IMU1: "Connector", Manufacturer_Name="TE Connectivity", Mouser Part Number=571-440055-5, Arrow Part Number=440055-5, Arrow Price/Stock=https://www.arrow.com/en/products/440055-5/te-connectivity?region=nac, Datasheet Link=https://www.te.com/commerce/DocumentDelivery/DDEController?Action=srchrtrv&DocNm=1-1773713-2_HPI_QRG_EN&DocType=Data%20Sheet&DocLang=English&PartCntxt=440055-5&DocFormat=pdf, Height=5.25mm, Manufacturer_Part_Number=440055-5, Mouser Price/Stock=https://www.mouser.co.uk/ProductDetail/TE-Connectivity/440055-5?qs=DE9Qji9blsSCZ1TIZpnBjw%3D%3D
J1: library part CMP-1241-00227-1, "1.0 mm Pitch Easy-On(TM) Type FPC Connector, 3.0 mm Mated Height, Right Angle, ZIF, SMT, Bottom Contact, 6 Circuits, -40 to 85 degC, ELV and RoHS Compliant, Tape and Reel", Current (Max per Contact)=0.5A, Manufacturer=Molex, Voltage (Max)="50V AC (RMS)/DC", Circuits (Loaded)=6, ComponentLink1Description="Manufacturer URL", ComponentLink1URL=http://www.molex.com/molex/index.jsp, ComponentLink2Description=Datasheet, ComponentLink2URL=http://www.molex.com/webdocs/datasheets/pdf/en-us/0522710679_FFC_FPC_CONNECTORS.pdf, ComponentLink3Description="Package Specification", ComponentLink3URL=http://www.molex.com/pdm_docs/sd/522710679_sd.pdf, Contact Position=Bottom, Durability (mating cycles max)=30, Entry Angle="90degrees Angle", Mated Height=3.00mm, Material - Metal="Phosphor Bronze", Material - Plating Mating=Tin-Bismuth, Material - Plating Termination=Tin-Bismuth, Mounting Technology="Surface Mount", Number of Rows=1, Orientation="Right Angle", PackageDescription="6-Lead FPC Connector, Pitch 1.0 mm", PackageReference=52271-0679, PackageVersion="Rev. B, 04/2004", Packing="Tape and Reel", PartNumber=52271-0679, PCB Locator=No, PCB Retention=Yes, Pitch - Mating Interface=1.00mm, Pitch - Termination Interface=1.00mm, Polarized to PCB=Yes, RoHS=TRUE, Stackable=No
J2: library part CMP-1241-00531-1, "0.5 mm Pitch Easy-On(TM) Type FPC Connector, 2.0 mm Mated Height, Right Angle, ZIF, SMT, Bottom Contact, 40 Circuits, -20 to 85 degC, ELV and RoHS Compliant, Tape and Reel", Current (Max per Contact)=0.5A, Manufacturer=Molex, Voltage (Max)=50V, Circuits (Loaded)=40, ComponentLink1Description="Manufacturer URL", ComponentLink1URL=http://www.molex.com/molex/index.jsp, ComponentLink2Description=Datasheet, ComponentLink2URL=http://www.molex.com/webdocs/datasheets/pdf/en-us/0541324062_FFC_FPC_CONNECTORS.pdf, ComponentLink3Description="Package Specification", ComponentLink3URL=http://www.molex.com/pdm_docs/sd/541324062_sd.pdf, Contact Position=Bottom, Durability (mating cycles max)=20, Entry Angle="90degrees Angle", Mated Height=2.00mm, Material - Metal="Phosphor Bronze", Material - Plating Mating=Gold, Material - Plating Termination=Gold, Mounting Technology="Surface Mount", Number of Rows=1, Orientation="Right Angle", PackageDescription="40-Lead FPC Connector, Pitch 0.5 mm", PackageReference=54132-4062, PackageVersion="Rev. F, 07/2010", Packing="Tape and Reel", PartNumber=54132-4062, PCB Locator=No, PCB Retention=Yes, Pitch - Mating Interface=0.50mm, Polarized to PCB=Yes, RoHS=TRUE, Stackable=No
J3: library part CMP-245163-000001-1, "CONN RCPT USB2.0 TYPEC 5A", Current Rating=5/6.25/1.25/0.25A, Manufacturer=GCT, Package=0, Temperature="-40°C to +85°C", Temperature Range High=+85°C, Temperature Range Low=-40°C, Voltage Rating=20V, Automotive=No, Category=Conn, ComponentLink2Description=Datasheet, ComponentLink2URL=https://gct.co/files/drawings/usb4105.pdf, Conn Orientation="Right Angle", Contact Material=Gold,Nickel, Device Class L1=Connectors, Device Class L2="USB Connectors", Device Class L3=unset, Digikey Description="CONN RCPT USB2.0 TYPEC 5A", Height=3.46mm, Is Female=yes, Lead Free=Yes, Manufacturer Part Number=USB4105-GF-A, Number Of Contacts=16, Octopart=https://octopart.com/usb4105-gf-a-gct-106627878, RoHS=TRUE, Usb Standard="USB 2.0"
J4: library part CMP-00504-00289289-1, "BM14B-GHS-TBT(LF)(SN) Conn Shrouded Header HDR 14 POS 1.25mm Solder ST Top Entry SMD T/R", Color=Natural, Current Rating=1A, Max Operating Temperature=85°C, Min Operating Temperature=-25°C, Voltage Rating=50V, Connector Type="Male Pin", Contact Material="Copper, Tin", Contact Plating=Tin, Fastening Type=Latch, Height=4.2mm, Housing Color=Natural, Housing Material=Nylon, Lead Free="Lead Free", Mount="Surface Mount", NexarPartId=289289, Number Of Contacts=14, Number of Positions=14, Number of Rows=1, Packaging="Cut Tape", Pitch=1.2446mm, RoHS=Compliant, Termination=Solder
L1: library part CMP-07248-000008-1, "FIXED IND 3.3UH 3.5A 76 MOHM SMD", Manufacturer=Bourns, Manufacturer Part Number=SRP4020TA-3R3M, Package=SRP4020TA, Rms Current=3.5A, Saturation Current=4A, Self Resonant Frequency=40MHz, Series Resistance=76mΩ, Temperature="-40°C to +150°C", Temperature Range High=+150°C, Temperature Range Low=-40°C, Test Frequency=100kHz, Tolerance=20%, Automotive=Yes, Automotive Grade="Grade 0", Category=Ind, ComponentLink2Description=Datasheet, ComponentLink2URL=https://www.bourns.com/docs/Product-Datasheets/SRP4020TA.pdf, Composition=Wirewound, Core Material="Carbonyl Powder", Device Class L1="Passive Components", Device Class L2=Inductors, Device Class L3="Fixed Inductors", Digikey Description="FIXED IND 3.3UH 3.5A 76 MOHM SMD", Height=2.1mm, Inductance=3.3uH, Lead Free=Yes, Mouser Description="Ind Power Shielded Wirewound 3.3uH 20% 100KHz Carbonyl Powder 3.5A T/R", Octopart=https://octopart.com/srp4020ta-3r3m-bourns-47300338, Q Factor=10, RoHS=TRUE, Shielding=true
LS1: "Loudspeaker or Buzzer", Manufacturer_Name=TDK, Mouser Part Number=810-PS1240P02BT, Arrow Part Number=PS1240P02BT, Arrow Price/Stock=https://www.arrow.com/en/products/ps1240p02bt/tdk?utm_currency=USD&region=nac, Datasheet Link=https://product.tdk.com/system/files/dam/doc/product/sw_piezo/sw_piezo/piezo-buzzer/catalog/piezoelectronic_buzzer_ps_en.pdf, Manufacturer_Part_Number=PS1240P02BT, Mouser Price/Stock=https://www.mouser.co.uk/ProductDetail/TDK/PS1240P02BT?qs=d7g9p1yFhWaZXSY9MjKMkw%3D%3D
P1: library part CMP-2000-05165-1, "Male Header, Pitch 2 mm, 1 x 4 Position, Height 6 mm, Tail Length 3.4 mm, -25 to 85 degC, RoHS, Bulk", Manufacturer=JST, Datasheet URL=http://datasheet.octopart.com/B4B-PH-K-S%28LF%29%28SN%29-JST-datasheet-10558886.pdf, Datasheet Version=Apr-09, Manufacturer URL=http://www.jst.com/home2.html, No of Positions=4, Pitch=2mm, Style/Orientation=StraightHeader/Plug, Termination=Crimp, Type=ShroudedHeader
R1 R4 R5 R6 R7 R8 R9 R12 R19 R21 R22 R23 R24 R27 R28 R38: library part CMP-03412-040683-1, "RES 10kΩ 5.00% 0.2W 0603"
R2 R25 R29 R31: library part CMP-03412-043770-1, "RES 100kΩ 1.00% 0.2W 0603"
R3: library part CMP-26527-000647-1, "1.3kΩ ±5% 0.1W 0603 Thick Film Chip Resistor AEC-Q200 compliant", Case/Package=0603, Max Operating Temperature=155°C, Min Operating Temperature=-55°C, Resistor Type="Thick Film", Temperature Coefficient=100ppm/°C, Tolerance=5%, Contact Plating=Tin, Mount="Surface Mount", Packaging="Tape and Reel", Radiation Hardening=No, Resistance=1.3kR, RoHS Compliant=Yes
R10 R13: library part CMP-03412-047308-1, "Thin Film Chip Resistors Automotive Grade 5.1kΩ 1% 50ppm/°C 0603"
R11 R40: library part CMP-26527-000066-1, "1MΩ ±5% 0.125W 0805 Thick Film Chip Resistor AEC-Q200 compliant", Case Code (Imperial)=0805, Case Code (Metric)=2012, Max Operating Temperature=155°C, Max Power Dissipation=125mW, Min Operating Temperature=-55°C, Resistor Type="Thick Film", Temperature Coefficient=200ppm/°C, Tolerance=5%, Case/Package=0805, Construction=Rectangular, Contact Plating=Tin, Depth=1.25mm, Features="Automotive AEC-Q200", Height=0.026inch, Lead Free="Lead Free", Length=2mm, Military Standard=Not, Mount="Surface Mount", Number of Terminations=2, Packaging="Tape and Reel", Radiation Hardening=No, Resistance=1MR, RoHS Compliant=Yes, Series=RMCF, Width=0.049inch
R14 R18: library part CMP-26527-002321-1, "22Ω ±5% 0.1W 0603 Thick Film Chip Resistor AEC-Q200 compliant", Case/Package=0603, Max Operating Temperature=155°C, Max Power Dissipation=100mW, Min Operating Temperature=-55°C, Resistor Type="Thick Film", Temperature Coefficient=200ppm/°C, Tolerance=5%, Contact Plating=Tin, Features="Automotive AEC-Q200", Height=0.022inch, Length=0.061inch, Mount="Surface Mount", Number of Terminations=2, Packaging="Tape and Reel", Radiation Hardening=No, Resistance=22R, RoHS Compliant=Yes, Series=RMCF, Width=0.031inch
R15 R20: library part CMP-03211-000377-1, "SMD Chip Resistor, Thin Film, 4.7KΩ, 100 V, 0805 [2012 Metric], 100 mW, 0.1%, RN73 Series", Manufacturer="TE Connectivity", Manufacturer Part Number=RN73C2A4K7BTDF, Package=RN732A, Power Rating=0.1W, Resistance=4.7KΩ, Temperature="-55°C to 155°C", Temperature Coefficient=10ppm/°C, Temperature Range High=155°C, Temperature Range Low=-55°C, Tolerance=0.1%, Voltage Rating=100V, Automotive=No, Category=Res, ComponentLink2Description=Datasheet, ComponentLink2URL=https://www.te.com/commerce/DocumentDelivery/DDEController?Action=showdoc&DocId=Data+Sheet%7F1773270%7FP%7Fpdf%7FEnglish%7FENG_DS_1773270_P.pdf%7F1676162-2, Composition="Thin Film", Device Class L1="Passive Components", Device Class L2=Resistors, Device Class L3="Chip SMD Resistors", Height=0.65mm, Ipc Land Pattern Name=RESC200125X55, Lead Free=Yes, Octopart=https://octopart.com/rn73c2a4k7btdf-te+connectivity-22737749, octopart_url=https://octopart.com/rn73c2a4k7btdf-te+connectivity-22737749, Packaging="1000 Reel", RoHS=TRUE, Series=RN73
R16 R30: library part CMP-2100-03673-1, "Chip Resistor, 0 Ohm, Jumper, +/- 5%, 0.125 W, -55 to 155 degC, 0805 (2012 Metric), RoHS, Tape and Reel", Case Code (Imperial)=0805, Case Code (Metric)=2012, Manufacturer=Yageo, Max Operating Temperature=155degC, Min Operating Temperature=-55degC, Package Description="2-Pin Surface Mounted Device, Body 2 x 1.25 mm", Power Rating=125mW, Resistance=0mOhm, Temperature Coefficient=200ppm/degreesC, Tolerance=5%, Voltage Rating=150V, Case/Package=0805, Composition=ThickFilm, Contact Plating=Tin, Datasheet URL=http://www.yageo.com/NewPortal/yageodocoutput?fileName=/pdf/R-Chip/PYu-RC_Group_51_RoHS_L_5.pdf, Datasheet Version="Rev. 5, 10/2016", Depth=1.25mm, Height=0.5mm, Lead Free=LeadFree, Length=2mm, Manufacturer URL=http://www.yageo.com/, Military Standard=Not, Number of Pins=2, Package Reference=0805, Packaging=TapeandReel, Radiation Hardening=No, REACH SVHC=Unknown, RoHSCompliant=true, Termination=SMD/SMT, Voltage Rating (DC)=150V, Width=1.25mm
R17: library part CMP-2000-00859-1, Manufacturer=Panasonic, Part Number=ERJ-3RQFR68V
R26: library part CMP-2000-04678-2, "RES SMD 1.6K OHM 1% 1/10W 0603", Manufacturer=Yageo, Manufacturer Part Number=RT0603FRE071K6L, Package=RT0603, Power Rating=0.1W, Resistance=1.6KΩ, Temperature="-55°C to +155°C", Temperature Coefficient="50 ppm/°C", Temperature Range High=+155°C, Temperature Range Low=-55°C, Tolerance=0.01, Voltage Rating=75V, Automotive=No, Category=Res, ComponentLink2Description=Datasheet, ComponentLink2URL=http://www.yageo.com/documents/recent/PYu-RT_1-to-0.01_RoHS_L_9.pdf, Composition="Thin Film", Device Class L1="Passive Components", Device Class L2=Resistors, Device Class L3="Chip SMD Resistors", Digikey Description="RES SMD 1.6K OHM 1% 1/10W 0603", Footprint Url=http://www.yageo.com/exep/pages/download/literatures/PYu-R_Mount_10.pdf, Height=0.55mm, Ipc Land Pattern Name=RESC16080X45, Lead Free=Yes, Mouser Description="Res Thin Film 0603 1.6K Ohm 1% 1/10W ±50ppm/°C Molded SMD SMD Paper T/R", Octopart=https://octopart.com/rt0603fre071k6l-yageo-1421906, RoHS=TRUE, Series=RT
R32 R33 R34 R37: library part CMP-26527-003272-1, "33Ω ±1% 0.125W 0805 Thick Film Chip Resistor AEC-Q200 compliant", Case Code (Imperial)=0805, Case Code (Metric)=2012, Max Operating Temperature=155°C, Max Power Dissipation=125mW, Min Operating Temperature=-55°C, Resistor Type="Thick Film", Temperature Coefficient=100ppm/°C, Tolerance=1%, Case/Package=0805, Contact Plating=Tin, Features="Automotive AEC-Q200", Height=0.026inch, Length=0.079inch, Mount="Surface Mount", Number of Terminations=2, Packaging="Tape and Reel", Radiation Hardening=No, Resistance=33R, RoHS Compliant=Yes, Series=RMCF, Width=0.049inch
R35 R36 R39: library part CMP-26527-000148-1, "100Ω ±1% 0.125W 0603 High Power Anti-Sulfur Thin Film Chip Resistor", Case Code (Imperial)=0603, Case Code (Metric)=1608, Max Operating Temperature=155°C, Max Power Dissipation=125mW, Min Operating Temperature=-55°C, Resistor Type="Thin Film", Temperature Coefficient=100ppm/°C, Tolerance=1%, Case/Package=0603, Contact Plating=Tin, Features="Moisture Resistant", Height=0.02inch, Lead Free="Lead Free", Length=0.059inch, Mount="Surface Mount", Number of Terminations=2, Packaging="Tape and Reel", Radiation Hardening=No, Resistance=100R, RoHS Compliant=Yes, Series=RNCP, Width=0.031inch
SW1 SW2: library part CMP-1452-00013-5, "Switch Tactile N.O. SPST Round Button Gull Wing 0.05A 12VDC 1000000Cycles 1.57N SMD Reel", Color=Black, Contact Current Rating=50mA, Contact Resistance=100mΩ, Insulation Resistance=100MΩ, Max Operating Temperature=85°C, Min Operating Temperature=-40°C, Voltage Rating=12V, Actuator Length=900µm, Actuator Material="Liquid Crystal Polymer, Polymer", Contact Material="Stainless Steel, Steel", Contact Plating=Silver, Current Rating=50mA, Diameter=3.5mm, Height=4.3mm, Illumination Type="Illuminated, Non-Illuminated", Lead Free="Lead Free", Length=6.2mm, Mechanical Life=1Mcycles, Mount="Surface Mount", Packaging="Tape and Reel", REACH SVHC=No, RoHS=Compliant, Switch Function=Off-Mom, Switch Travel=250µm, Termination="Gull Wing", Throw Configuration=SPST, Width=6.2mm
TP1 TP2 TP3 TP4 TP5 TP6 TP9 TP11 TP14 TP16: "Test Point", Manufacturer_Name=Harwin, Mouser Part Number=855-S1751-46R, Datasheet Link=https://content.harwin.com/m/c5b84e6a45e9b9f6/original/DRG-02202-Technical-Drawing-Datasheet-S1751R-pdf.pdf, Height=2mm, Manufacturer_Part_Number=S1751-46R, Mouser Price/Stock=https://www.mouser.co.uk/ProductDetail/Harwin/S1751-46R?qs=l6ZPVqNVZb71wETAKrfRig%3D%3D
TP7 TP8 TP10 TP12 TP13 TP15 TP17: library part CMP-00028-00002-2, "0.6mm round", Pins=1
U1: library part CMP-04913-000052-1, "IC PWR MGMT EFUSE 2.7-18V 8WSON", Max Operating Temperature=125°C, Min Operating Temperature=-40°C, Output Current=4A, Accuracy=7.5%, Mount="Surface Mount", Number of Channels=1, Packaging="Cut Tape", RoHS Compliant=Yes
U2: library part CMP-0244-00276-1, "1.5A Max Constant Current LED driver, 8-Pin VDFPN, Tape and Reel", ComponentLink1Description="Manufacturer URL", ComponentLink1URL=http://www.st.com, ComponentLink2Description=Datasheet, ComponentLink2URL=http://www.st.com/internet/com/TECHNICAL_RESOURCES/TECHNICAL_LITERATURE/DATASHEET/CD00185793.pdf, DatasheetVersion=1/07/2008, PackageDescription="8-Pin Dual Flat No-Lead, 3 x 3 x 1 mm Body, 0.5 mm Pitch, Exposed Pad", PackageReference=DFN8(3x3)-P050, PackageVersion=2008
U3: library part CMP-04912-000027-1, "POWER MANAGEMENT"
U4: library part CMP-12757-000006-1, "IC REG BUCK 3.3V 2A TSOT26", Ambient Temperature Range High=+85°C, Ambient Temperature Range Low=-40°C, Manufacturer="Diodes Inc.", Max Junction Temp=+160°C, Max Supply Voltage=32V, Min Supply Voltage=3.8V, Nominal Supply Current=22uA, Output Current=2A, Output Voltage=3.3V, Package=TSOT26, Switching Frequency=1.1MHz, Temperature="to +160°C", Automotive=No, Category=IC, ComponentLink2Description=Datasheet, ComponentLink2URL=https://www.diodes.com/assets/Datasheets/AP63200-AP63201-AP63203-AP63205.pdf, Device Class L1="Integrated Circuits (ICs)", Device Class L2="Power Management ICs", Device Class L3="Voltage Regulators - Switching", Digikey Description="IC REG BUCK 3.3V 2A TSOT26", Footprint Url=https://www.diodes.com/assets/Package-Files/TSOT26.pdf, Height=1mm, Lead Free=Yes, Manufacturer Part Number=AP63203WU-7, Mouser Description="AP63203 Series 3.3 V 2 A SMT Fixed Low IQ Synchronous Buck - TSOT-26", Number Of Outputs=1, Octopart=https://octopart.com/ap63203wu-7-diodes+inc.-98099550, Output Type=Fixed, RoHS=TRUE, Standoff Height=0.01mm, Switching Topology=Buck, Temperature Range High=+160°C

## Free pads (board coordinates)
  round 6 hole 3.2 unplated: MH3(30.48,79.375) MH3(30.48,121.92) MH3(124.46,79.375) MH3(124.46,121.92)

## Via types
v1: diameter 0.6, hole 0.3, Top Layer to Bottom Layer, 275 vias

## Nets (pads, with @x,y where several pads share a name; then routed paths per layer and width w, separated by ;. In a path a pad name is that pad's centre, name@x,y a point inside that pad or via, vN(x,y) a via of type N, cw(c..) or ccw(c..) an arc to the next point about the centre after c; other vN are vias at no path point)
B1Y: IC3.8 R35.1 | length 1.8
  Top Layer w0.3: R35.1@106.886,95.774 106.889,95.777 106.889,97.564 IC3.8@106.892,97.564
B2: IC3.1 R36.1 | length 1.6
  Top Layer w0.3: IC3.1@110.042,97.564 110.462,97.564 110.814,97.212 111.454,97.212 R36.1@111.495,97.171
BL_LED_K: C13.1 J2.34 J2.35 J2.36 J2.37 U2.4 | length 12
  Top Layer w0.3: J2.37@72.876,97.033 J2.36@72.876,97.533 ; J2.34@72.876,98.533 72.898,98.533 72.898,98.033 J2.36@72.898,97.533 ; J2.36@73.379,97.536 75.302,97.536 76.073,96.765 76.073,95.377 76.454,94.996 76.454,94.297 76.679,94.072 C13.1@76.708,94.072 ; C13.1@76.789,94.153 78.582,92.36 U2.4@80.567,92.36
BL_SENSE: R17.1 U2.5 | length 1.7
  Top Layer w0.4: U2.5@83.717,92.285 84.541,91.461 84.723,91.461 84.923,91.261 R17.1@84.923,91.186
BOOT_MODE: IC1.27 R8.2 SW2.A1 SW2.A2 TP7.1 | length 55.8
  Top Layer w0.3: R8.2@82.792,98.425 82.815,98.425 83.171,98.069 83.171,98.046 83.681,97.536 99.695,97.536 104.267,102.108 104.267,107.315 109.157,112.205 ; R8.2@82.792,98.552 83.058,98.818 IC1.27@83.058,101.217 ; TP7.1@110.998,112.141 109.22,112.141 109.157,112.205 ; SW2.A2@114.971,123.355 114.935,123.319 114.935,115.57 114.971,115.534 SW2.A1@114.971,115.405 114.471,114.905 114.471,114.598 113.284,113.411 110.363,113.411 109.157,112.205
BTN_MULTI_WAKE: IC1.25 J4.13 R28.2 | length 42.5
  Top Layer w0.3: v1(80.249,103.759) 80.33,103.759 80.523,103.952 81.488,103.952 IC1.25@81.788,104.252 ; v1(94.488,85.852) 94.545,85.795 95.18,85.795 96.249,84.726 J4.13@96.249,83.732 ; v1(105.664,85.852) 105.664,86.602 106.313,87.251 106.313,87.274 106.669,87.63 R28.2@106.692,87.63
  Bottom Layer w0.3: v1(80.249,103.759) 80.249,99.71 86.487,93.472 87.122,93.472 94.431,86.163 94.431,85.909 v1(94.488,85.852) v1(105.664,85.852)
BUZZER_DRIVE: LS1.1 R39.2 R40.1 | length 9.2
  Top Layer w0.4: R40.1@34.614,99.822 34.614,106.232 LS1.1@35.607,107.224 ; R40.1@34.998,99.568 R39.2@36.382,99.568
BUZZER_PWM: IC1.36 R39.1 | length 82.2
  Top Layer w0.3: R39.1@37.644,100.076 37.789,99.932 37.789,99.371 59.563,77.597 79.883,77.597 92.583,90.297 v1(93.726,90.297) ; IC1.36@94.468,101.217 94.488,101.197 v1(94.488,99.441)
  Bottom Layer w0.3: v1(93.726,90.297) 94.488,91.059 v1(94.488,99.441)
DISP_TOUCH_RST: IC1.8 J1.6 J2.30 | length 57.4
  Top Layer w0.3: J2.30@72.876,100.533 74.936,100.533 75.465,101.062 v1(75.468,101.062) ; J1.6@75.597,82.59 75.747,82.44 76.397,82.44 76.835,82.002 76.835,81.479 77.089,81.225 v1(77.089,81.153) ; v1(90.551,119.888) 90.551,118.824 IC1.8@90.658,118.717
  Bottom Layer w0.3: v1(77.089,81.153) 77.089,83.083 77.216,83.21 77.216,85.06 76.454,85.822 76.454,99.187 76.835,99.568 76.835,100.33 76.161,101.004 75.526,101.004 v1(75.468,101.062) 75.468,103.281 79.248,107.061 80.772,107.061 81.28,107.569 81.28,116.713 84.455,119.888 v1(90.551,119.888)
EFUSE_FLT: R1.1 TP4.1 U1.6 | length 29.9
  Top Layer w0.3: v1(48.133,94.742) 48.133,94.12 48.908,93.345 TP4.1@49.149,93.345 ; U1.6@51.058,110.707 51.058,109.978 51.582,109.454 52.096,109.454 52.99,108.56 53.873,108.56 R1.1@54.229,108.204 53.975,107.95 v1(53.975,107.188)
  Bottom Layer w0.3: v1(48.133,94.742) 52.324,94.742 56.642,99.06 56.642,107.569 56.007,108.204 54.991,108.204 v1(53.975,107.188)